# EAGLE board NinjaLAMP_Arduino_simple (EAGLE 9.6.1)
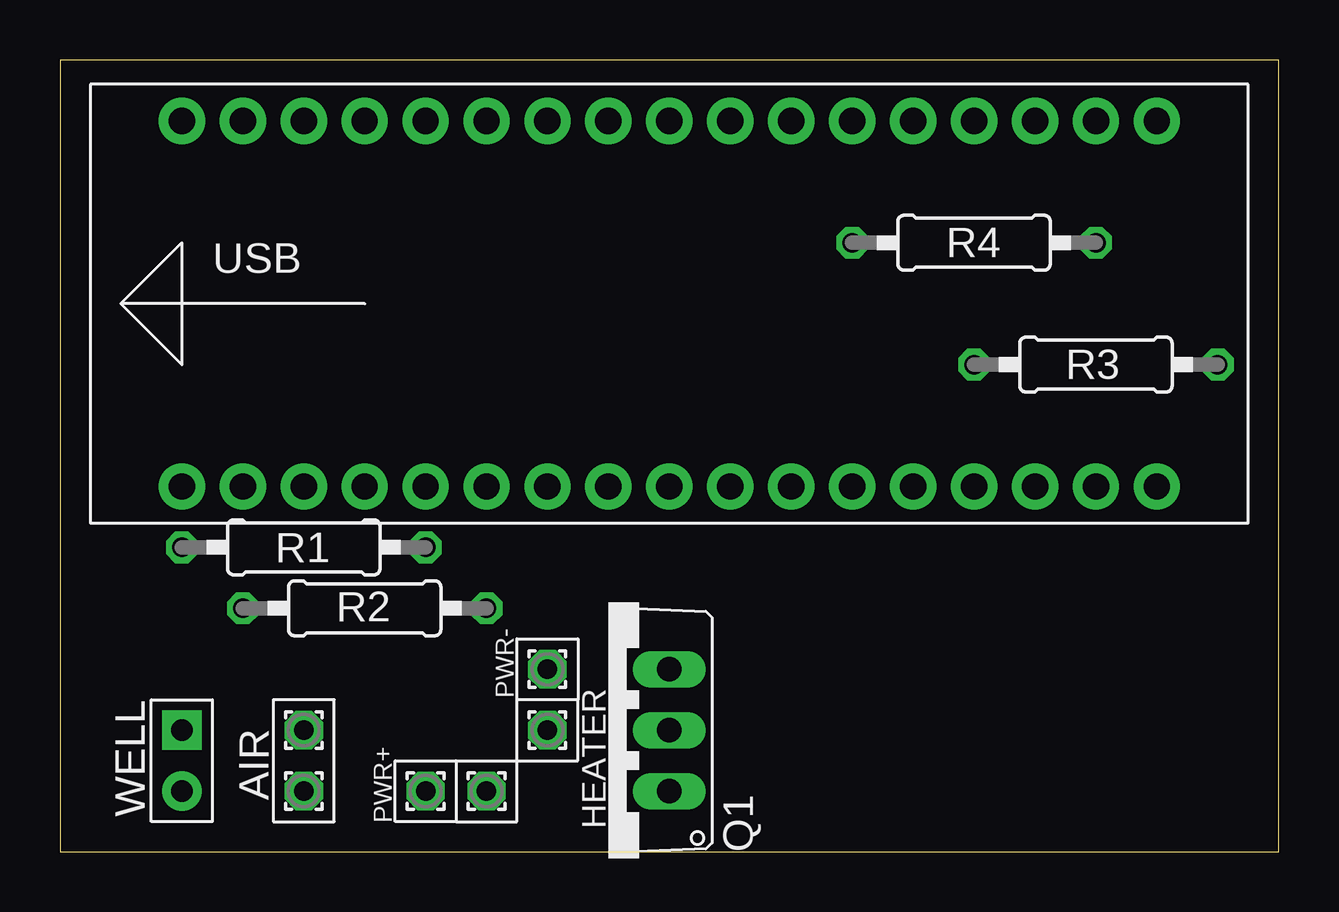
[diagram p0: board, top side]
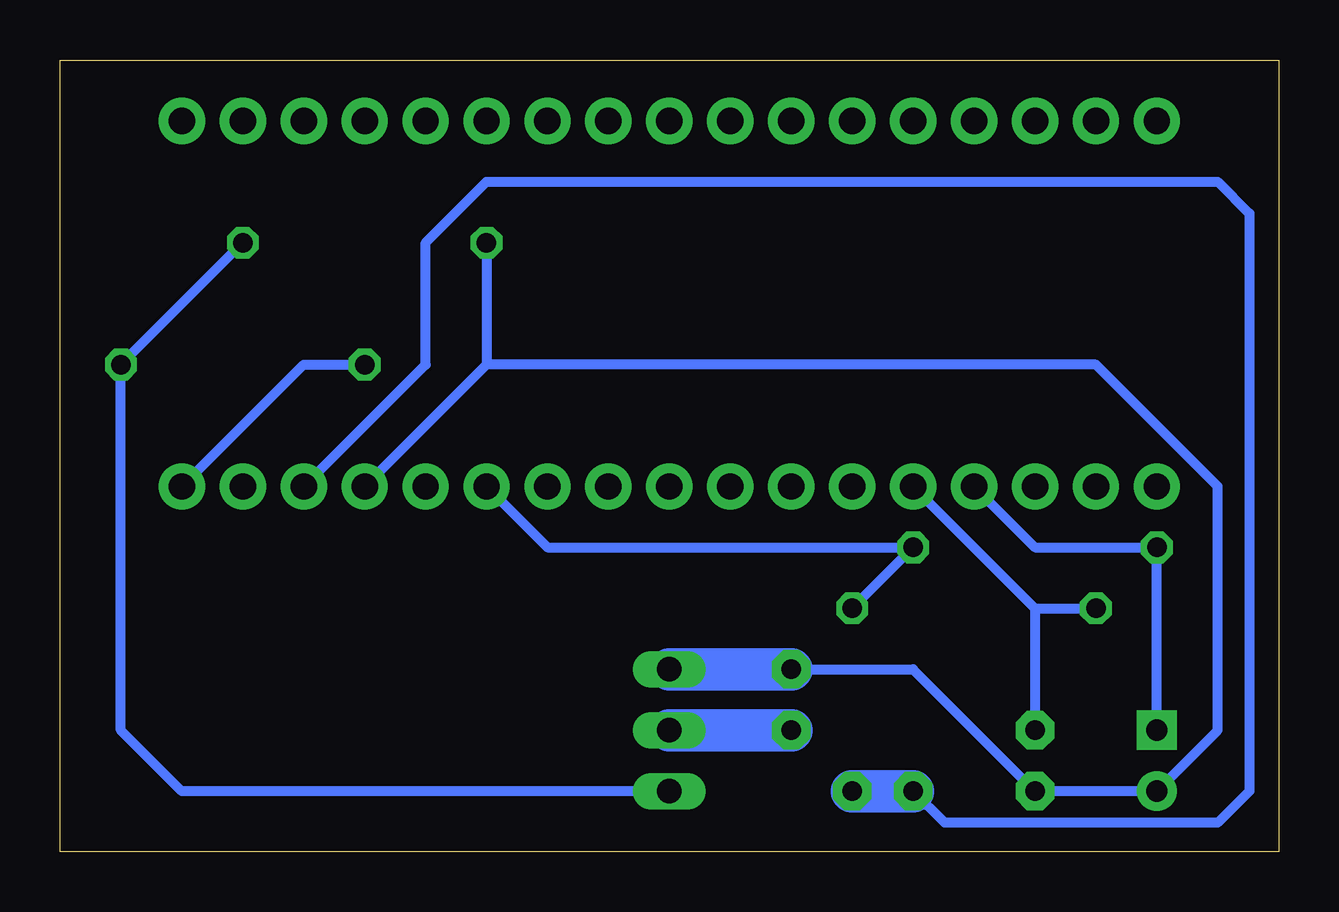
[diagram p1: board, bottom side, seen from below]

Size 50.8 x 33.02 mm. Coordinates in mm from the lower left corner, seen from the top.
Outline: 0,0 50.8,0 50.8,33.02 0,33.02 0,0
Copper layers (1*16): Top 0.035mm / dielectric 1.5mm / Bottom 0.035mm
Design rules "default": minimum track width 6mil, minimum drill 0.35mm, track to track 6mil, track to pad 6mil, pad to pad 6mil, via to via 6mil, smd to smd 6mil, copper to edge 40mil, drill to drill 6mil, minimum pad ring 10mil, minimum via ring 8mil, stop-mask expansion 4mil, vias tented up to drill 0mil, thermal gap 10mil

## Footprints (pad centres in the part's own frame; a part is rotated, then mirrored left to right if it is on the bottom)
1,6/0,8 = drill 0.813 pad 1.6 octagon: 1 0,0
H2-2.54 = drill 0.889 pad 1.651 square: 1 0,1.27 | drill 0.889 pad 1.651: 2 0,-1.27
TO220V = drill 1.016 long: 1 -2.54,-2.54; 2 0,-2.54; 3 2.54,-2.54
0207/10 = drill 0.813 octagon: 1 -5.08,0; 2 5.08,0
ARDUINOMICRO = drill 1.1 pad 1.93: P$1 -20.32,7.62; P$2 -17.78,7.62; P$3 -15.24,7.62; P$4 -12.7,7.62; P$5 -10.16,7.62; P$6 -7.62,7.62; P$7 -5.08,7.62; P$8 -2.54,7.62; P$9 0,7.62; P$10 2.54,7.62; P$11 5.08,7.62; P$12 12.7,-7.62; P$13 10.16,-7.62; P$14 12.7,7.62; P$15 15.24,7.62; P$16 17.78,7.62; P$17 20.32,7.62; P$18 20.32,-7.62; P$19 17.78,-7.62; P$20 15.24,-7.62; P$21 7.62,7.62; P$22 10.16,7.62; P$23 7.62,-7.62; P$24 5.08,-7.62; P$25 2.54,-7.62; P$26 0,-7.62; P$27 -2.54,-7.62; P$28 -5.08,-7.62; P$29 -7.62,-7.62; P$30 -10.16,-7.62; P$31 -12.7,-7.62; P$32 -15.24,-7.62; P$33 -17.78,-7.62; P$34 -20.32,-7.62

## Placement (x,y rotation side)
HEATER1  [1,6/0,8]  17.78,2.54 0 top
HEATER2  [1,6/0,8]  20.32,5.08 0 top
NTC_AIR1  [1,6/0,8]  10.16,5.08 0 top
NTC_AIR2  [1,6/0,8]  10.16,2.54 0 top
NTC_WELL  2p-2.54  [H2-2.54]  5.08,3.81 0 top
POWER+  [1,6/0,8]  15.24,2.54 0 top
POWER-  [1,6/0,8]  20.32,7.62 0 top
Q1  [TO220V]  22.86,5.08 90 top
R1  47K  [0207/10]  10.16,12.7 0 top
R2  47K  [0207/10]  12.7,10.16 0 top
R3  1K  [0207/10]  43.18,20.32 0 top
R4  47K  [0207/10]  38.1,25.4 180 top
U$1  ARDUINOMICRO  [ARDUINOMICRO]  25.4,22.86 0 top

## Library data of the parts
HEATER1 HEATER2 NTC_AIR1 NTC_AIR2 POWER+ POWER- = wirepad
NTC_WELL = OPL_Connector; MPN: P125-1102A0BS116A1
Q1 U$1 = adafruit
R1-R4 = resistor

## Nets
5V: R1.2 R2.2 U$1.P$23
12V: HEATER1.1 POWER+.1 U$1.P$20
A0: NTC_WELL.1 R1.1 U$1.P$31
A1: NTC_AIR1.1 R2.1 U$1.P$30
D15: R3.1 U$1.P$18
DRAIN: HEATER2.1 Q1.2
GATE: Q1.1 R3.2 R4.1
GND: NTC_AIR2.1 NTC_WELL.2 POWER-.1 Q1.3 R4.2 U$1.P$12

## Tracks (layer width: path | path; a pad name or v marks a point on that pad's centre or on a via)
5V
  Bottom 0.406: R2.2 R1.2 30.48,12.7 U$1.P$23
12V
  Bottom 0.406: U$1.P$20 35.56,20.32 35.56,25.4 33.02,27.94 2.54,27.94 1.22,26.62 1.22,2.54 2.54,1.22 13.92,1.22 POWER+.1
  Bottom 1.778: POWER+.1 HEATER1.1
A0
  Bottom 0.406: NTC_WELL.1 R1.1 10.16,12.7 U$1.P$31
A1
  Bottom 0.406: 10.16,10.16 NTC_AIR1.1 | U$1.P$30 10.16,10.16 | 10.16,10.16 R2.1
D15
  Bottom 0.406: U$1.P$18 40.64,20.32 R3.1
DRAIN
  Bottom 1.778: HEATER2.1 Q1.2
GATE
  Bottom 0.406: R4.1 R3.2 48.26,5.08 45.72,2.54 Q1.1
GND
  Bottom 0.406: R4.2 33.02,20.32 | 33.02,20.32 U$1.P$12 | 33.02,20.32 7.62,20.32 2.54,15.24 2.54,5.08 NTC_WELL.2 NTC_AIR2.1 15.24,7.62 POWER-.1
  Bottom 1.778: POWER-.1 Q1.3

## Text on the board
tPlace: USB
tNames: PWR- | AIR | WELL | PWR+ | HEATER